# EAGLE board Microkontroller (EAGLE 9.2.0)
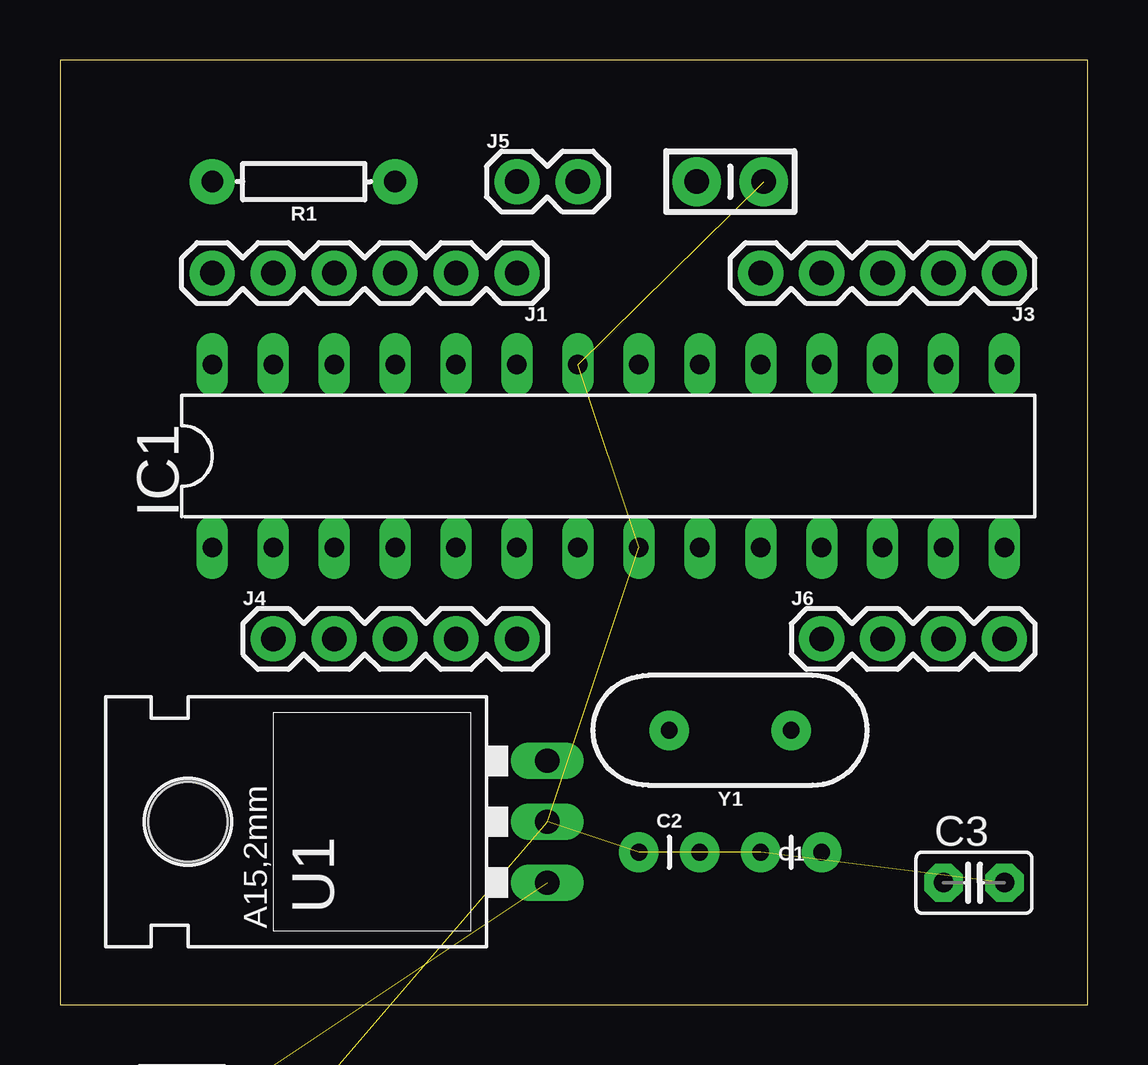
[diagram p0: board, top side]
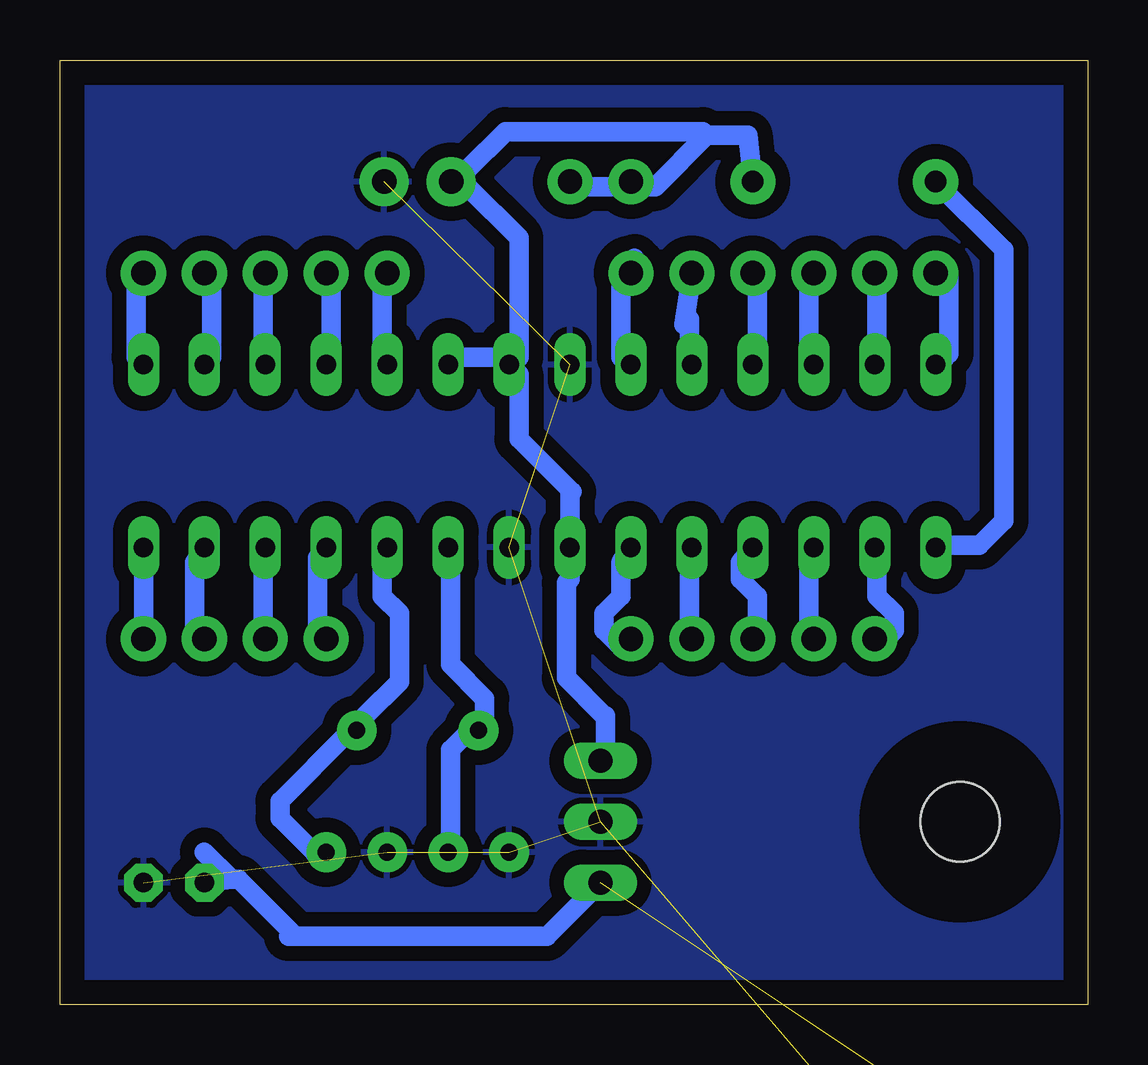
[diagram p1: board, bottom side, seen from below]

Size 42.85 x 39.36 mm. Coordinates in mm from the lower left corner, seen from the top.
Outline: 0,0 42.85,0 42.85,39.36 0,39.36 0,0
Copper layers (1*16): Top 0.035mm / dielectric 1.5mm / Bottom 0.035mm
Design rules "default": minimum track width 6mil, minimum drill 0.35mm, track to track 6mil, track to pad 6mil, pad to pad 6mil, via to via 6mil, smd to smd 6mil, copper to edge 40mil, drill to drill 6mil, minimum pad ring 10mil, minimum via ring 8mil, stop-mask expansion 4mil, vias tented up to drill 0mil, thermal gap 10mil
Net classes: 0 default: width 0.813 mm, drill 0.61 mm, clearance 0.61 mm

## Footprints (pad centres in the part's own frame; a part is rotated, then mirrored left to right if it is on the bottom)
CAP-PTH-2.54 = drill 0.7 pad 1.651: 1 -1.27,0; 2 1.27,0
C2.5-2 = drill 0.813 pad 1.6 octagon: 1 -1.27,0; 2 1.27,0
CAP-PTH-SMALL-KIT = drill 1.016 pad 2.032: 1 -1.397,0; 2 1.397,0
AB9V = drill 1.118 pad 3.15 octagon: + 0,2.54; - 0,-2.54
DIL28-3 = drill 0.813 long: 1 -16.51,-3.81; 2 -13.97,-3.81; 3 -11.43,-3.81; 4 -8.89,-3.81; 5 -6.35,-3.81; 6 -3.81,-3.81; 7 -1.27,-3.81; 8 1.27,-3.81; 9 3.81,-3.81; 10 6.35,-3.81; 11 8.89,-3.81; 12 11.43,-3.81; 13 13.97,-3.81; 14 16.51,-3.81; 15 16.51,3.81; 16 13.97,3.81; 17 11.43,3.81; 18 8.89,3.81; 19 6.35,3.81; 20 3.81,3.81; 21 1.27,3.81; 22 -1.27,3.81; 23 -3.81,3.81; 24 -6.35,3.81; 25 -8.89,3.81; 26 -11.43,3.81; 27 -13.97,3.81; 28 -16.51,3.81
1X06 = drill 1.016 pad 1.88: 1 0,0; 2 2.54,0; 3 5.08,0; 4 7.62,0; 5 10.16,0; 6 12.7,0
1X05 = drill 1.016 pad 1.88: 1 0,0; 2 2.54,0; 3 5.08,0; 4 7.62,0; 5 10.16,0
1X02 = drill 1.016 pad 1.88: 1 0,0; 2 2.54,0
1X04 = drill 1.016 pad 1.88: 1 0,0; 2 2.54,0; 3 5.08,0; 4 7.62,0
AXIAL-0.3 = drill 0.9 pad 1.88: P$1 -3.81,0; P$2 3.81,0
78XXL = drill 1.016 long: GND 0,-3.81; IN -2.54,-3.81; OUT 2.54,-3.81 | hole 3.302: 0,11.176
HC49US = drill 0.7 pad 1.651: 1 -2.54,0; 2 2.54,0

## Placement (x,y rotation side)
C1  22pF  [CAP-PTH-2.54]  30.48,6.35 180 top
C2  22pF  [CAP-PTH-2.54]  25.4,6.35 0 top
C3  0.33 uF  [C2.5-2]  38.1,5.08 0 top
C4  0.1uF  [CAP-PTH-SMALL-KIT]  27.94,34.29 0 top
G1  AB9V  [AB9V]  5.08,-7.62 0 top  (outside the outline)
IC1  ATMEGA168-20P  [DIL28-3]  22.86,22.86 0 top
J1  [1X06]  19.05,30.48 180 top
J3  [1X05]  39.37,30.48 180 top
J4  [1X05]  8.89,15.24 0 top
J5  [1X02]  19.05,34.29 0 top
J6  [1X04]  31.75,15.24 0 top
R1  10k  [AXIAL-0.3]  10.16,34.29 180 top
U1  [78XXL]  16.51,7.62 90 top
Y1  16MHz  [HC49US]  27.94,11.43 180 top

## Library data of the parts
C1 C2 = SparkFun-Capacitors; PROD_ID: CAP-09128
C3 = capacitor-wima
C4 = SparkFun-Capacitors; PROD_ID: CAP-08370
G1 = battery
IC1 = adafruit
J1 = SparkFun-Connectors; PROD_ID: CONN-08437
J3-J5 = SparkFun-Connectors
J6 = SparkFun-Connectors; PROD_ID: CONN-09696
R1 = SparkFun-Resistors; PROD_ID: RES-12183
U1 = SparkFun-IC-Power
Y1 = SparkFun-Clocks; PROD_ID: XTAL-08181; SF_ID: COM-00536

## Nets
GND: C1.2 C2.1 C3.2 C4.2 G1.- IC1.8 IC1.22 U1.GND
N$1: IC1.13 J6.3
N$2: IC1.26 J1.4
N$3: IC1.27 J1.5
N$4: IC1.28 J1.6
N$5: C2.2 IC1.9 Y1.2
N$6: C1.1 IC1.10 Y1.1
N$7: C4.1 IC1.7 IC1.20 IC1.21 J5.1 J5.2 R1.P$1 U1.OUT
N$8: IC1.1 R1.P$2
N$9: C3.1 G1.+ U1.IN
N$10: IC1.3 J4.2
N$11: IC1.2 J4.1
N$12: IC1.12 J6.2
N$13: IC1.5 J4.4
N$14: IC1.6 J4.5
N$15: IC1.11 J6.1
N$16: IC1.4 J4.3
N$17: IC1.17 J3.3
N$18: IC1.18 J3.4
N$19: IC1.19 J3.5
N$20: IC1.14 J6.4
N$21: IC1.15 J3.1
N$22: IC1.16 J3.2
N$23: IC1.25 J1.3
N$24: IC1.24 J1.2
N$25: IC1.23 J1.1

## Tracks (layer width: path | path; a pad name or v marks a point on that pad's centre or on a via)
GND  (7 unrouted)
  pour Bottom: -1.27,40.64 44.45,40.64 44.45,-1.27 -1.27,-1.27
N$1
  Bottom 0.813: IC1.13 37.24,18.44 37.24,15.6 J6.3
N$2
  Bottom 0.813: IC1.26 11.63,26.98 11.63,29.82 J1.4
N$3
  Bottom 0.813: IC1.27 8.79,26.98 8.79,29.82 J1.5
N$4
  Bottom 0.813: IC1.28 5.94,26.98 5.79,27.13 5.79,30.38 5.94,30.53 J1.6
N$5
  Bottom 0.813: IC1.9 26.57,18.44 26.57,14.17 25.15,12.75 25.15,12.04 Y1.2 25.86,11.33 26.57,10.62 26.57,6.35 C2.2
N$6
  Bottom 0.813: IC1.10 29.41,18.44 29.41,17.02 28.7,16.31 28.7,13.46 30.12,12.04 Y1.1 30.84,11.33 33.68,8.48 33.68,7.77 32.26,6.35 C1.1
N$7
  Bottom 0.813: 15.9,36.22 14.16,36.22 R1.P$1 | 15.9,36.22 18.03,34.09 18.74,34.09 J5.1 19.46,34.09 21.59,34.09 J5.2 | 15.9,36.22 16.05,36.37 24.28,36.37 25.86,34.8 C4.1 25.86,34.09 23.72,31.95 23.72,26.98 IC1.21 | IC1.21 23.72,26.26 23.72,23.57 21.51,21.36 21.59,21.28 IC1.7 21.59,17.73 21.74,17.58 21.74,13.61 20.17,12.04 20.12,12.04 20.12,10.36 U1.OUT | IC1.20 26.57,26.98 24.44,26.98 IC1.21
N$8
  Bottom 0.813: R1.P$2 3.51,31.45 3.51,20.17 4.52,19.15 5.94,19.15 IC1.1
N$9  (1 unrouted)
  Bottom 0.813: 36.83,6.35 35.7,5.22 | 33.33,2.84 33.02,2.84 | 33.02,2.84 22.55,2.84 U1.IN | C3.1 35.7,5.22 | 33.02,2.84 35.4,5.22 35.7,5.22
N$10
  Bottom 0.813: IC1.3 11.48,19 11.63,19 11.63,15.6 J4.2
N$11
  Bottom 0.813: IC1.2 8.79,18.44 8.79,17.02 8.08,16.31 8.08,15.6 8.79,14.88 J4.1
N$12
  Bottom 0.813: IC1.12 34.39,18.44 34.39,15.6 J6.2
N$13
  Bottom 0.813: IC1.5 16.61,18.44 16.61,15.6 J4.4
N$14
  Bottom 0.813: IC1.6 19.46,18.44 19.46,17.02 20.17,16.31 20.17,15.6 19.46,14.88 J4.5
N$15
  Bottom 0.813: J6.1 32.11,15.6 32.11,18.62 IC1.11
N$16
  Bottom 0.813: IC1.4 14.48,18.44 14.48,17.73 13.77,17.02 13.77,15.6 J4.3
N$17
  Bottom 0.813: IC1.17 34.39,26.98 34.39,29.82 J3.3
N$18
  Bottom 0.813: IC1.18 31.55,26.98 31.55,29.82 J3.4
N$19
  Bottom 0.813: IC1.19 29.41,26.98 29.41,29.82 J3.5
N$20
  Bottom 0.813: IC1.14 J6.4 39.37,14.88
N$21
  Bottom 0.813: IC1.15 39.37,26.98 39.67,26.98 39.67,30.53 39.37,30.53 J3.1
N$22
  Bottom 0.813: IC1.16 36.53,26.98 36.53,29.82 J3.2
N$23
  Bottom 0.813: IC1.25 13.77,26.98 13.77,29.82 J1.3
N$24
  Bottom 0.813: IC1.24 16.61,26.98 16.61,28.55 16.84,28.32 J1.2
N$25
  Bottom 0.813: 18.9,31.09 19.05,30.94 J1.1 19.05,29.97 19.46,30.38 19.46,26.98 IC1.23